# Altium PCB RoboFut.PcbDoc
Units mil, origin at the board's own origin, x right, y up, seen from the top; angles counter-clockwise.
Board outline 2896.14 x 2896.14 mil, 2 copper layers (Top Layer, Bottom Layer); 23 components, 53 nets, 120 pads, 23 vias.
Unrouted connection lines stored in the file: 2.
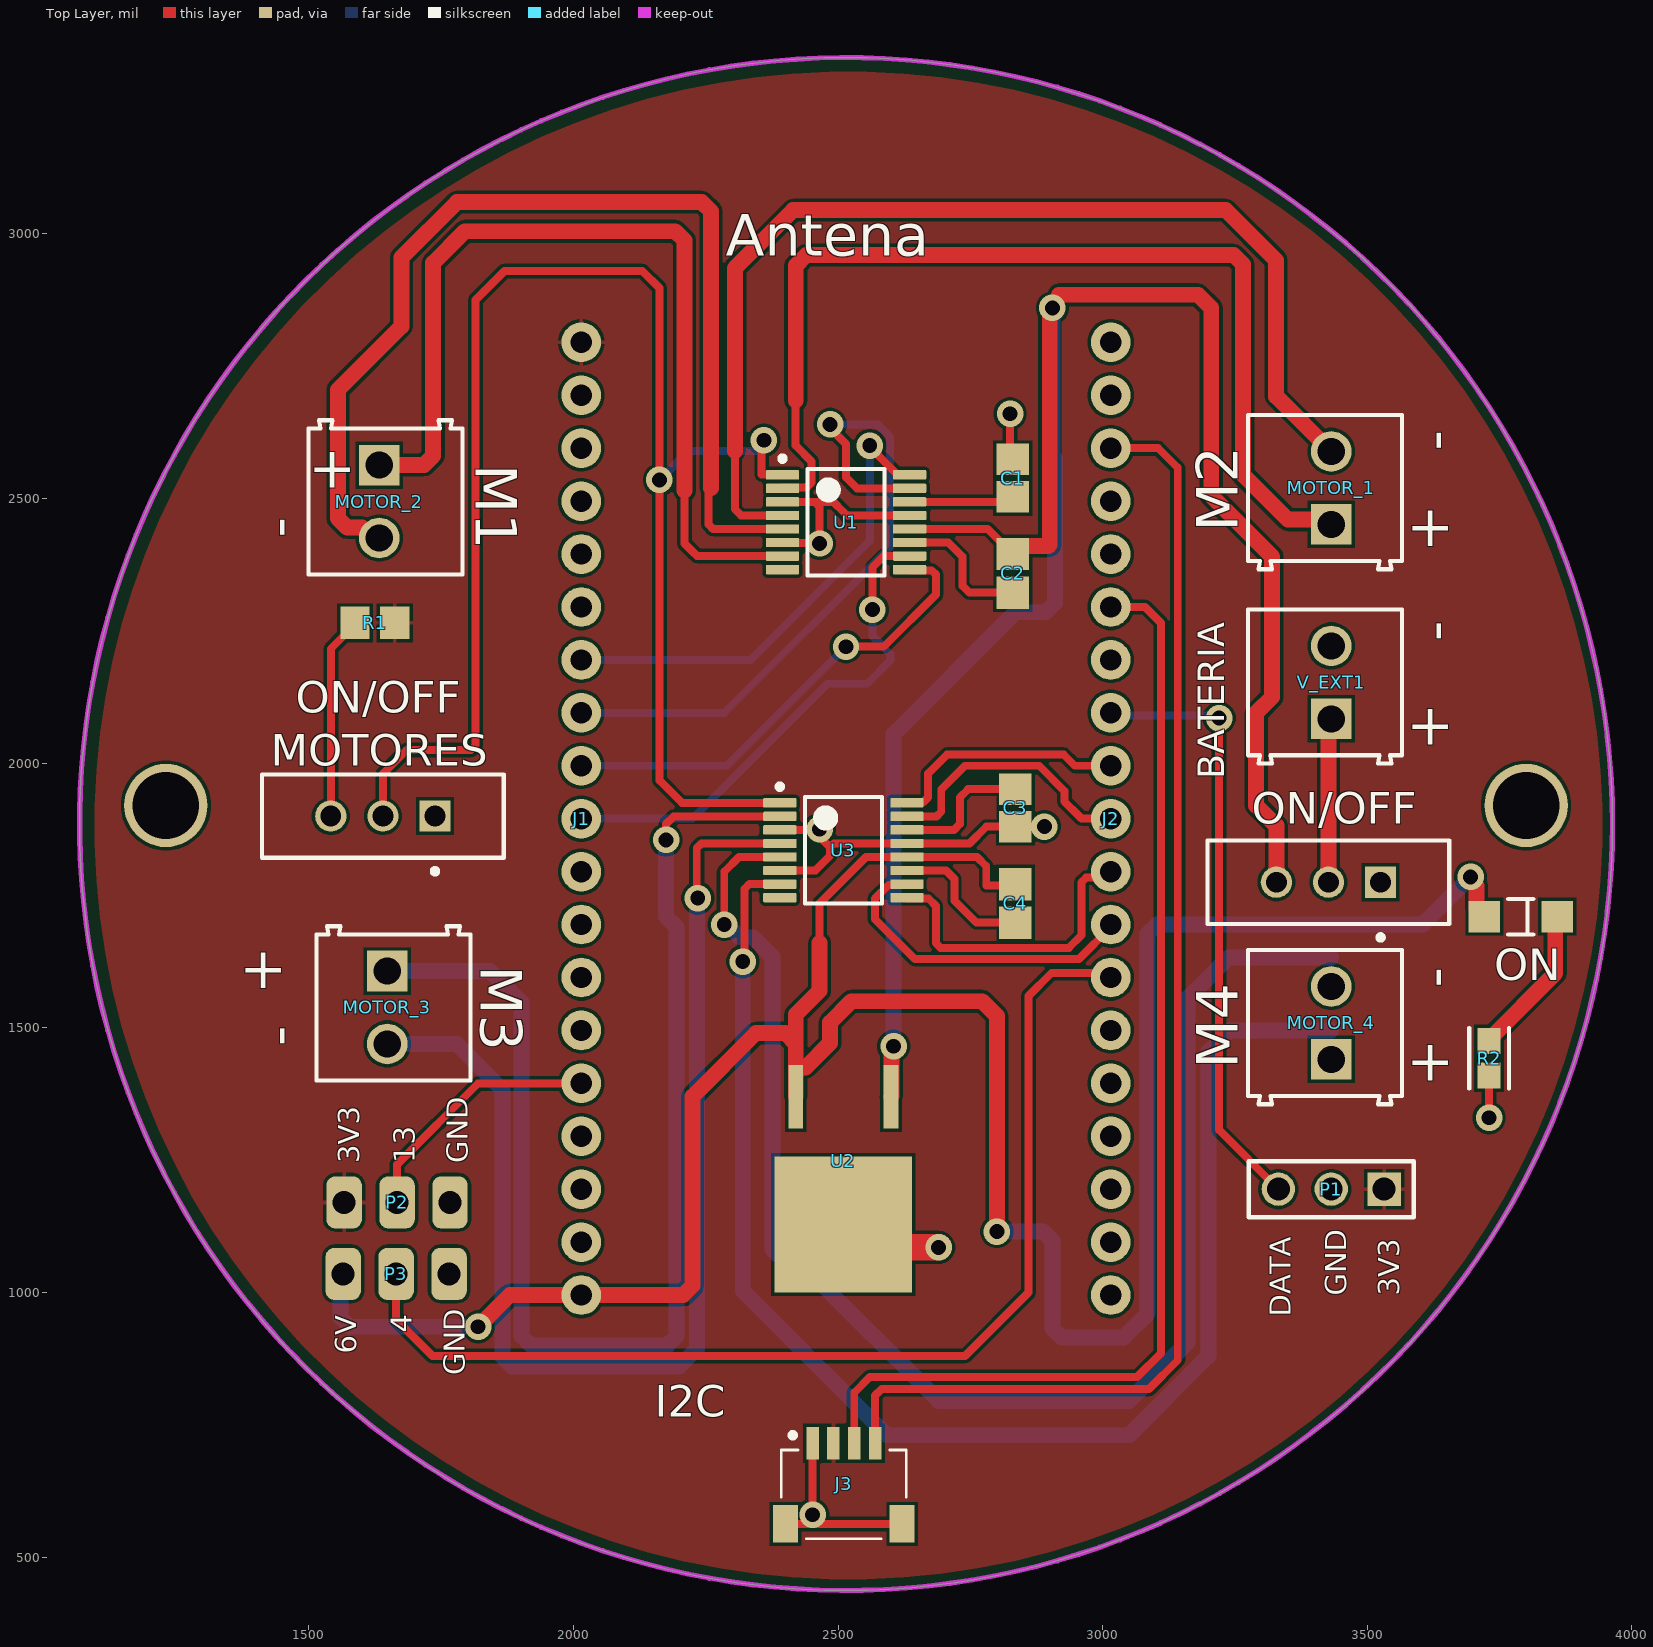
[diagram p0: Top Layer view]
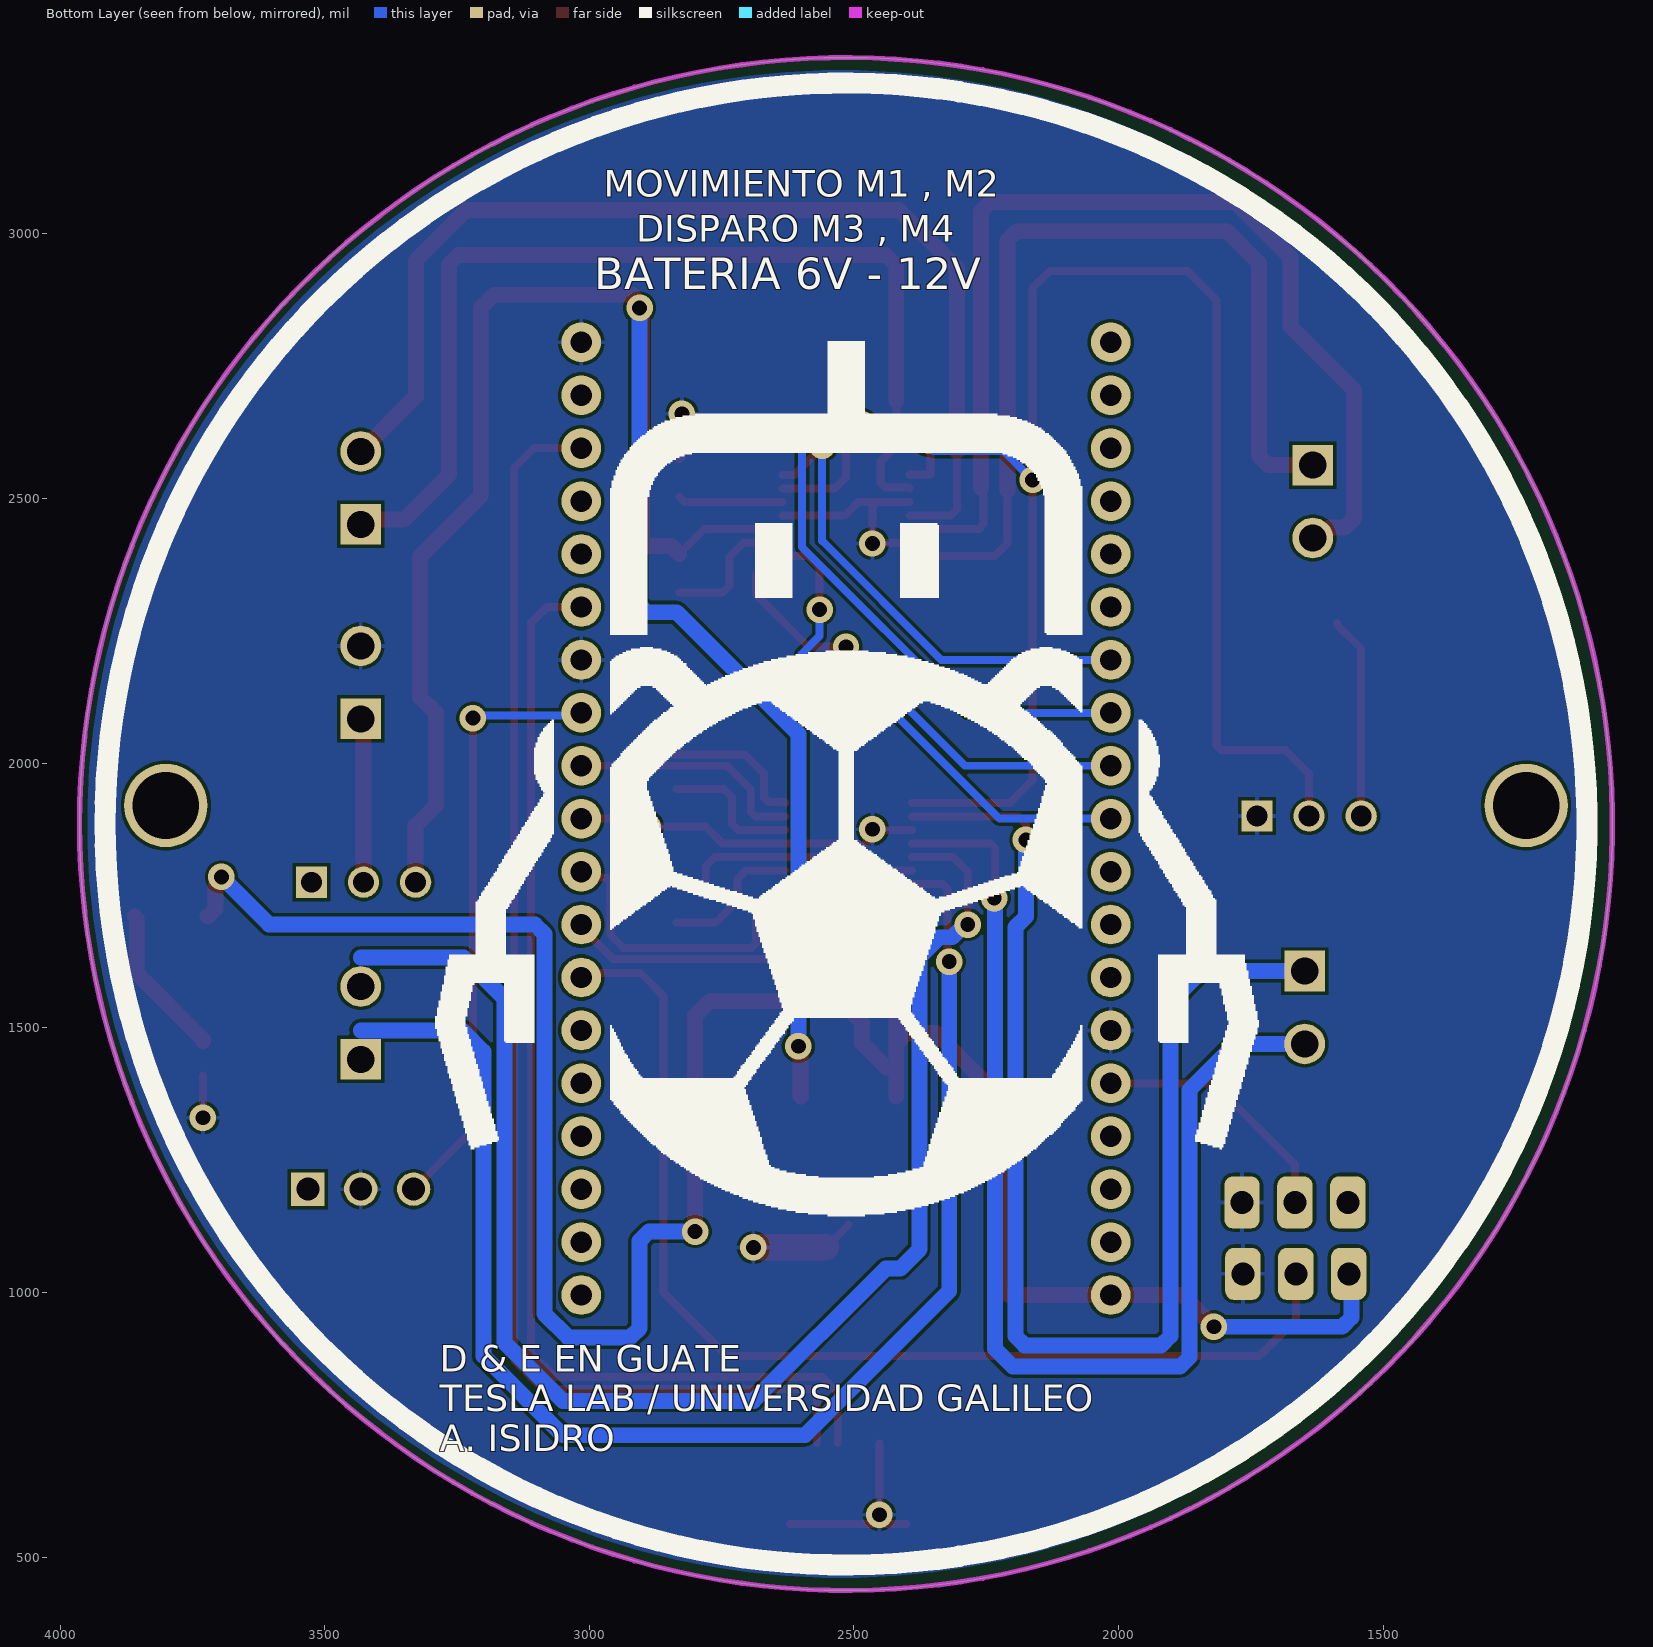
[diagram p1: Bottom Layer view, seen from below]
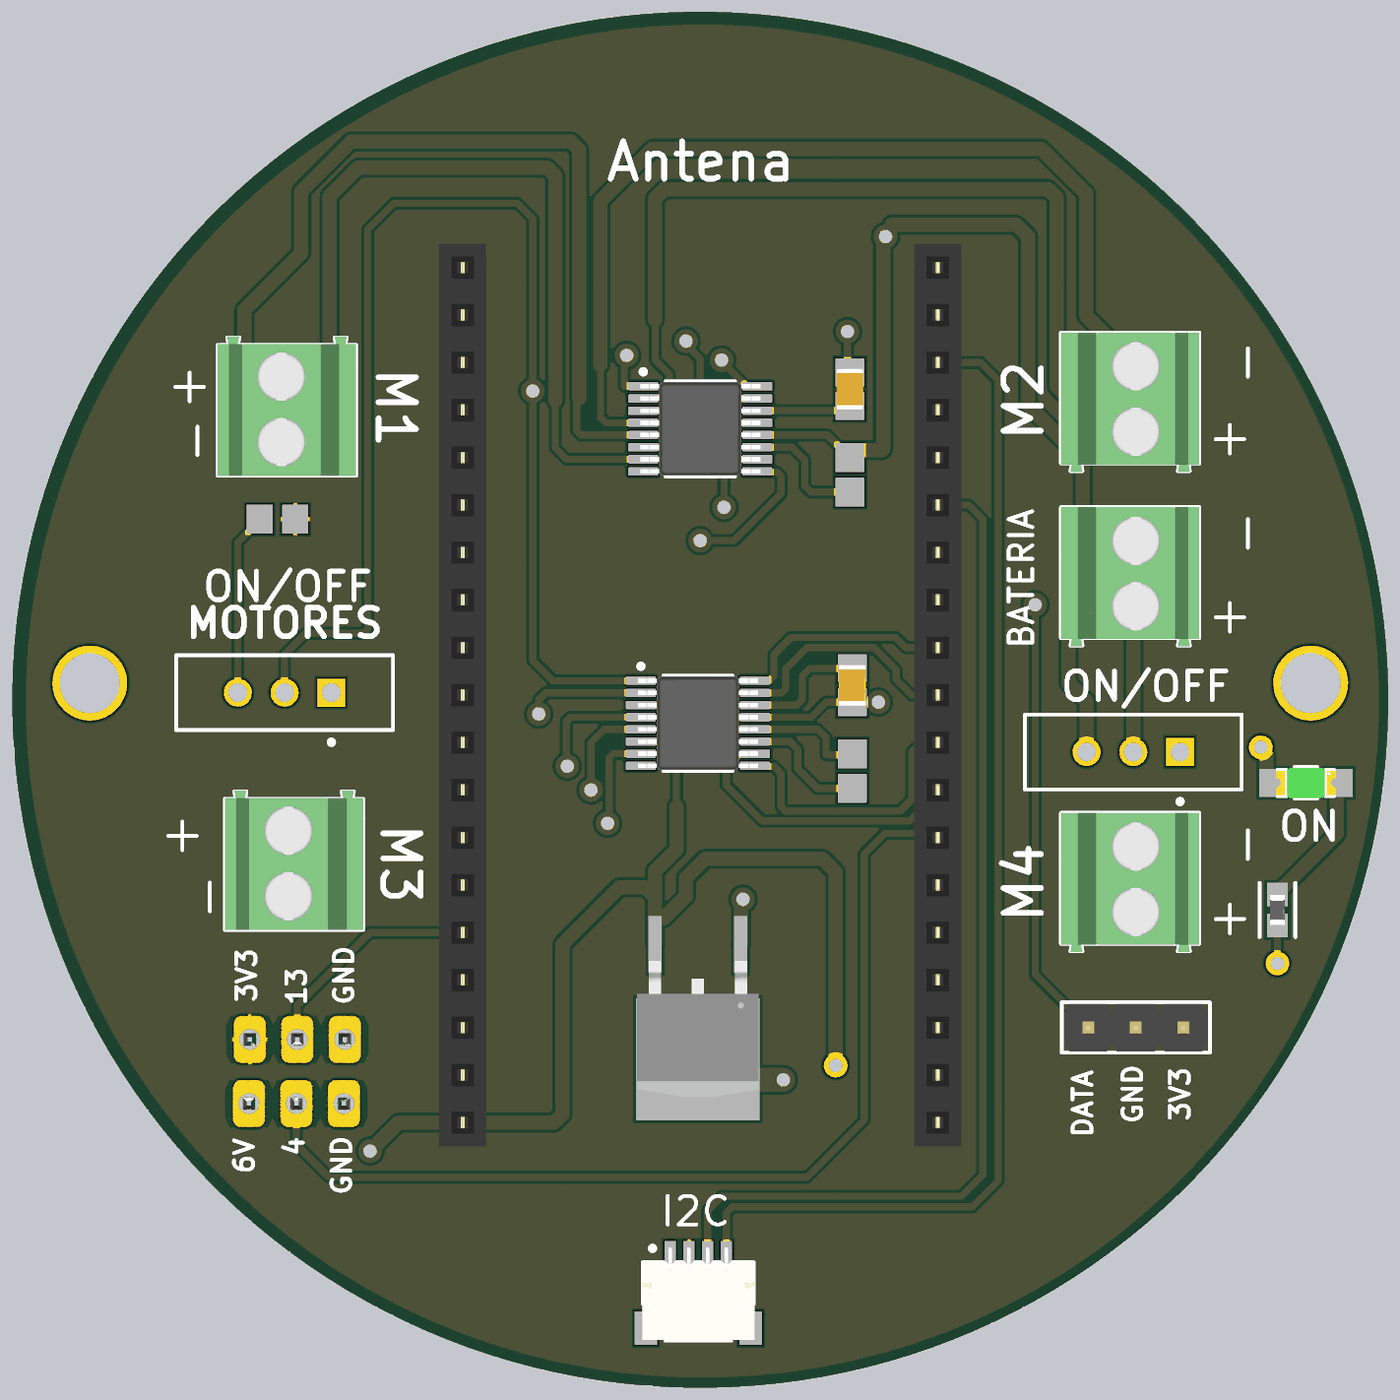
[diagram p2: 3D render of the assembled board from above, using the file's embedded part models]

## Layer stack, top to bottom
Top Solder: solder mask 0.4, Solder Resist, Dk 3.5
Top Layer: signal copper 1.4
Dielectric 1: dielectric 12.6, FR-4, Dk 4.8
Bottom Layer: signal copper 1.4
Bottom Solder: solder mask 0.4, Solder Resist, Dk 3.5

## Board outline
1066.93,1885 ccw(c2515,1885) 2515,436.93 ccw(c2515,1885) 3963.07,1885 ccw(c2515,1885) 2515,3333.07 ccw(c2515,1885)

## Design rules (kind name [scope] priority, off if disabled: settings)
BoardOutlineClearance [All] p1: gap=15 ignorepadtopadclearanceinfootprint=FALSE
Clearance [All] p1: gap=6 ignorepadtopadclearanceinfootprint=FALSE except(0: Arc-Hole Track-Hole SMDPad-Hole THPad-Hole Via-Hole Fill-Hole Poly-Hole Region-Hole Text-Hole)
ComponentClearance [All] p1: gap=1 collisioncheckmode=3 verticalgap=-10 showdistances=FALSE
DiffPairsRouting [All] p1: maxlimit=393.7 minlimit=6 mostfreqgap=8 toplayer_minwidth=6 toplayer_maxwidth=15 toplayer_prefwidth=8 bottomlayer_minwidth=6 bottomlayer_maxwidth=15 bottomlayer_prefwidth=8 maxuncoupledlength=500
HoleSize [All] p1: absolutevalues=TRUE maxlimit=265 minlimit=13 maxpercent=80.000 minpercent=20.000
HoleToHoleClearance [All] p1: gap=10 allowstackedmicrovias=FALSE
MinimumAnnularRing [All] p1: minimumring=7
MinimumSolderMaskSliver [All] p1: minsoldermaskwidth=0
PlaneClearance [All] p1: clearance=10
PlaneConnect [All] p1: planeconnectstyle=Direct reliefexpansion=16 reliefentries=4 reliefconductorwidth=6 reliefairgap=6
PolygonConnect [All] p1: connectstyle=Relief reliefconductorwidth=8 reliefentries=4 polygonreliefangle="90 Angle" airgapwidth=6
RoutingCorners [All] p1: cornerstyle=45-Degree minsetback=49.21 maxsetback=49.21
RoutingVias [All] p1: holewidth=15 width=30 viastyle="Through Hole" minholewidth=13 minwidth=27 maxholewidth=100 maxwidth=114
SilkToSilkClearance [All] p1: silktosilkclearance=0
SilkToSolderMaskClearance [IsPad] p1: minsilkscreentomaskgap=6 clearancetoexposedcopper=TRUE
SolderMaskExpansion [All] p1: expansion=2.95 istentingtop=FALSE
Width [All] p1: maxlimit=400 minlimit=6 preferedwidth=8
20 further rules are at their usual default settings.

## Classes and differential pairs
component class RoboFut: C1 C2 C3 C4 J1 J2 J3 MOTOR_1 MOTOR_2 MOTOR_3 MOTOR_4 ON ON/OFF P1 R1 R2 U1 U2 U3 V_EXT1

## Components (designator, comment, footprint, x,y, rotation, side; value= is the part's Value field where it differs from the comment)
C1 "0805ZD225KAT2A" CAPC2013X140X50ML20T25 2830,2538.58 r90 top
C2 "0.1 uF" CAPC2013X94X50ML20T25 2830,2358.58 r90 top
C3 "0805ZD225KAT2A" CAPC2013X140X50ML20T25 2835,1915.43 r270 top
C4 "0.1 uF" CAPC2013X94X50ML20T25 2835,1735 r90 top
J1 "PH1-19-UA" "PH1-19-UA - Socket" 2015,2795 r270 top locked
J2 "PH1-19-UA" "PH1-19-UA - Socket" 3015,2795 r270 top locked
J3 "SM04B-SRSS-TB(LF)(SN)" JST_SM04B-SRSS-TB(LF)(SN) 2510.94,715 r0 top
MOTOR_1 "691214110002" 691214110002 3420,2520 r90 top
MOTOR_2 "691214110002" 691214110002 1645,2494.25 r270 top
MOTOR_3 "691214110002" 691214110002 1660,1538.35 r270 top
MOTOR_4 "691214110002" 691214110002 3420,1509.09 r90 top
ON "HSMG-C150" FP-HSMG-C150-MFG 3790,1710 r180 top
ON/OFF "EG1218" ESWI-EG1218_V 3426.57,1775 r180 top (schematic designator ON/OFF2)
ON/OFF "EG1218" ESWI-EG1218_V 1640,1900 r180 top (schematic designator ON/OFF1)
P1 "61300311121" 61300311121#1 3431.81,1195 r180 top
P2 "61300311121" 61300311121#2 1666.81,1170 r180 top
P3 "61300311121" 61300311121#2 1665,1035 r180 top
R1 "ERA6AEB473V" RESC2013X60X40ML20T25 1625,2265 r0 top
R2 "ERA-3AEB471V" FP-ERA3A-IPC_A 3730,1442.49 r270 top
U1 "DRV8833PW" PW0016A_M 2515.08,2455.2 r0 top
U2 "BA06CC0FP-E2" TO252-3_ROM-M 2510,1130 r180 top
U3 "DRV8833PW" PW0016A_M 2510.08,1835.43 r0 top
V_EXT1 "691214110002" 691214110002 3420,2152.6 r90 top

## Footprints (in the part's own frame and the unit in brackets; to place one, negate y for a bottom-side part, rotate by r counter-clockwise, add the part's x,y. Pads: shape width x height; smd on the part's side, far side on the other; paste and mask are expansions set on the pad)
61300311121#1 [mm] "Pin Header, pitch 2.54 mm, THT, Vertical, single row, 3p"
  rect 1.6x1.6 hole 1.1: 1(-2.54,0)
  round 1.6 hole 1.1: 2(0,0) 3(2.54,0)
  silkscreen extent -3.96,-1.35 3.96,1.35, body extent -3.81,-1.27 3.81,1.27, height 8.57
61300311121#2 [mm] "Pin Header, pitch 2.54 mm, THT, Vertical, single row, 3p"
  rrect50% 1.7x2.5 hole 1.1: 1(-2.54,0) 2(0,0) 3(2.54,0)
  body extent -3.81,-1.27 3.81,1.27, height 8.57
691214110002 [mm] "3.50 mm Horizontal Entry Modular, 2p"
  rect 1.95x1.95 hole 1.3: 1(-1.75,-0.3)
  round 1.95 hole 1.3: 2(1.75,-0.3)
  silkscreen extent -3.9,-3.7 3.5,3.7, body extent -3.95,-3.7 3.5,3.7, height 8.55
CAPC2013X94X50ML20T25 [mm] "Chip Capacitor, 2-Leads, Body 2.01x1.25mm, IPC Low Density"
  rect 1.55x1.55 smd: 1(-0.925,0) 2(0.925,0)
  body extent -1.1,-0.72 1.11,0.72, height 0.94
CAPC2013X140X50ML20T25 [mm] "Chip Capacitor, 2-Leads, Body 2.2x1.45mm, IPC Low Density"
  rect 1.5x1.55 smd: 1(-0.9,0) 2(0.9,0)
  body extent -1.1,-0.72 1.1,0.72, height 1.4
ESWI-EG1218_V [mm] "THD, 3-Leads, Body 11.6x4mm, Pitch 2.5mm"
  rect 1.5x1.5 hole 1: 1(-2.5,0)
  round 1.5 hole 1: 2(0,0) 3(2.5,0)
  silkscreen extent -5.8,-2 5.8,2.77, body extent -5.8,-2 5.8,2, height 7.4
FP-ERA3A-IPC_A [mil]
  rect 49.41x43.55 smd paste+0 mask+0: 1(-32.51,0) 2(32.51,0)
  silkscreen extent -57,-38 57,38, body extent -77,-41 77,41, height 10
FP-HSMG-C150-MFG [mm]
  rect 1.5x1.5 smd paste+0 mask+0: 1(-1.75,0) 2(1.75,0)
  silkscreen extent -0.6,-0.85 0.6,0.85, body extent -2.6,-0.95 2.6,0.95, height 0.25
JST_SM04B-SRSS-TB(LF)(SN) [mm]
  rect 0.6x1.55 smd: 1(-1.5,0) 2(-0.5,0) 3(0.5,0) 4(1.5,0)
  rect 1.2x1.8 smd: S1(-2.8,-3.875) S2(2.8,-3.875)
  silkscreen extent -3,-4.57 3,0.48, body extent -3,-4.5 3,0.45, height 2.98
"PH1-19-UA - Socket" [mm] "Connector Header Through Hole 19 position 0.100\" (2.54mm)"
  round 1.905 hole 1.02: 1(0,0) 2(2.54,0) 3(5.08,0) 4(7.62,0) 5(10.16,0) 6(12.7,0) 7(15.24,0) 8(17.78,0) 9(20.32,0) 10(22.86,0) 11(25.4,0) 12(27.94,0) 13(30.48,0) 14(33.02,0) 15(35.56,0) 16(38.1,0) 17(40.64,0) 18(43.18,0) 19(45.72,0)
  body extent -1.27,-1.27 46.99,1.27, height 7
PW0016A_M [mm] "SOP, 16-Leads, Body 5.1x4.5mm, Pitch 0.65mm, IPC Low Density"
  rrect22% 1.6x0.45 smd: 1(-3.05,2.275) 2(-3.05,1.625) 3(-3.05,0.975) 4(-3.05,0.325) 5(-3.05,-0.325) 6(-3.05,-0.975) 7(-3.05,-1.625) 8(-3.05,-2.275) 9(3.05,-2.275) 10(3.05,-1.625) 11(3.05,-0.975) 12(3.05,-0.325) 13(3.05,0.325) 14(3.05,0.975) 15(3.05,1.625) 16(3.05,2.275)
  silkscreen extent -3.17,-2.55 1.85,3.17, body extent -3.21,-2.5 3.21,2.5, height 1
RESC2013X60X40ML20T25 [mm] "Chip Resistor, 2-Leads, Body 2.00x1.25mm, IPC Low Density"
  rect 1.4x1.55 smd: 1(-0.95,0) 2(0.95,0)
  body extent -1.1,-0.72 1.1,0.72, height 0.6
TO252-3_ROM-M [mil]
  rect 28x120 smd paste+0 mask+0: 1(-90,-240) 3(90,-240)
  rect 260x257 smd paste+0 mask+0: 2(0,2)
  body extent -128,-205 128,81, height 98

## Part data
C1 C3: library part CMP-2000-05810-1, "Chip Capacitor, 2.2 uF, +/- 10%, 10 V, -55 to 85 degC, 0805 (2012 Metric), RoHS, Tape and Reel", Capacitance=2.2µF, Case Size/Dimension=0805, Dielectric=X5R, Manufacturer=AVX, Package Description="2-Pin Surface Mount Device, Body 2.01 x 1.25 mm", Rated Voltage=10V, Tolerance (%)=±10%, Datasheet URL=http://datasheets.avx.com/cx5r.pdf, Datasheet Version=05/2016, Manufacturer URL=http://www.avx.com/, Mounting Technology=SurfaceMount, Package Reference=0805
C2 C4: library part CMP-2000-05016-1, "Chip Capacitor, Ceramic, 0.1 uF, 10%, 50 V, 0805, RoHS, Tape and Reel", Capacitance=100nF, Case Size/Dimension=0805, Dielectric=X7R, Manufacturer=AVX, Rated Voltage=50V, Tolerance (%)=±10%, Datasheet URL=http://www.farnell.com/datasheets/319609.pdf, Datasheet Version=Sep-07, Manufacturer URL=http://www.avx.com/
J1 J2: "Connector Header Through Hole 19 position 0.100\" (2.54mm)", Supplier Part Number 1=2057-PH1-19-UA-ND, Supplier 1=Digi-Key
J3: "Connector Header Surface Mount, Right Angle 4 position 0.039 _1.00mm_", Package=None, Availability=Unavailable, MF="JST Sales", MP=SM04B-SRSS-TB_LF__SN_, Price=None, SnapEDA_Link=https://www.snapeda.com/parts/SM04B-SRSS-TB%28LF%29%28SN%29/JST%20Sales%20America%20Inc./view-part/557466/?ref=snap
MOTOR_1 MOTOR_2 MOTOR_3 MOTOR_4 V_EXT1: library part CMP-1502-02464-1, "Serie 2141 - 3.50 mm Horizontal Entry Modular with Rising Cage Clamp WR-TBL, 2 pin", Manufacturer="Wurth Elektronik", Operating Temperature=-40to105degC, Datasheet URL=http://katalog.we-online.de/em/datasheet/6912141100xx.pdf, Manufacturer URL=http://www.we-online.de, Mounting Technology=THT, Package Reference=691214110002, Packaging=Box, Part Number=691214110002, Pin Number=2, Pitch=3.50mm, Publisher=WurthElektronik
ON: library part CMP-2000-05061-2, "LED GREEN DIFFUSED 1206 SMD", Colour=Green, Forward Current=20mA, Forward Voltage=2.2V, Manufacturer=Broadcom, Max Junction Temp=+95°C, Power Dissipation=65mW, Reverse Voltage=5V, Temperature="-40°C to +85°C", Temperature Range High=+85°C, Temperature Range Low=-40°C, Automotive=No, Category=Diode, ComponentLink2Description=Datasheet, ComponentLink2URL=https://docs.broadcom.com/docs/AV02-0551EN, Device Class L1=Optoelectronics, Device Class L2=LEDs, Device Class L3=unset, Digikey Description="LED GREEN DIFFUSED 1206 SMD", Height=1.2mm, Ipc Land Pattern Name=DIOCP320160X55, Lead Free=Yes, Led Orientation="Top View", Luminous Intensity=15mcd, Manufacturer Part Number=HSMG-C150, Mouser Description="LED Uni-Color Green 570nm 2-Pin Chip LED T/R", Octopart=https://octopart.com/hsmg-c150-broadcom-71131304, Package=HSMG-C150, Peak Emmision Wavelength=570nm, RoHS=TRUE, Viewing Angle=170°, Wavelength=572nm
ON/OFF ON/OFF: library part CMP-1696-00002-1, "Slide Switch, 500 V, -20 to 70 degC, 3-Pin THD, RoHS", Case\Package=SOT-23-5, Dropout Voltage="300 mV", Max Input Voltage="8 V", Max Operating Temperature="85 degC", Max Ouput Current="150 mA", Max Power Dissipation="250 mW", Min Input Voltage="4.3 V", Min Operating Temperature="-40 degC", Nominal Output Voltage="3.3 V", Package Quantity=3000, ComponentLink1Description="Manufacturer URL", ComponentLink1URL=http://www.e-switch.ch/en/, ComponentLink2Description=Datasheet, ComponentLink2URL=https://www.e-switch.com/system/asset/product_line/data_sheet/119/EG.pdf, DatasheetVersion=Oct-15, Height="1.3 mm", Length="3 mm", Mount="Surface Mount", Output Current="150 mA", Output Voltage="3.3 V", Outputs=1, PackageDescription="3-Pin Through Hole Device, Body 11.6 x 4 mm, Pitch 2.5 mm", PackageReference=EG1218, Packaging="Tape and Reel", Pins=5, Power Rating="250 mW", Radiation Hardening=No, REACH SVHC="No SVHC", RoHSCompliant=true, Width="1.8 mm"
P1 P2 P3: library part CMP-1502-01062-1, "THT Vertical Pin Header WR-PHD, Pitch 2.54 mm, Single Row, 3 pins", Contact Resistance=20mOhm, Manufacturer="Wurth Elektronik", Operating Temperature=-40to105degC, Rated Current=3A, Withstanding Voltage=500VAC, Working Voltage=250VAC, Datasheet URL=https://katalog.we-online.de/em/datasheet/6130xx11121.pdf, Gender=Male, Manufacturer URL=http://www.we-online.de, Mounting Technology=THT, Orientation=Vertical, Package Reference=61300311121, Packaging=Bag, Part Number=61300311121, Pin Number=3, Pitch=2.54mm, Publisher=WurthElektronik, Row Number=Single
R1: library part CMP-2001-00645-1, Manufacturer=Panasonic, Part Number=ERA6AEB473V
R2: library part CMP-2000-00071-2, "RES SMD 470 OHM 0.1% 1/10W 0603", Case Code (Imperial)=0603, Case Code (Metric)=1608, Max Operating Temperature=155°C, Max Power Dissipation=100mW, Min Operating Temperature=-55°C, Package Quantity=1, Resistance=470R, Resistance Tolerance=0.1%, Resistor Type="Thin Film", Temperature Coefficient=25ppm/°C, Voltage Rating=75V, Case/Package=0603, Construction=Rectangular, Contact Plating=Tin, Depth=0.8mm, Features="Automotive AEC-Q200", Height=0.45mm, Lead Free="Lead Free", Length=1.6mm, Military Standard=Not, Mount="Surface Mount", Number of Pins=2, Number of Terminations=2, Packaging="Tape and Reel", Power Rating=100mW, Radiation Hardening=No, REACH SVHC="No SVHC", RoHS Compliant=Yes, Series=ERA-3A, Size Code=0603, Technology="THIN FILM", Termination=SMD/SMT, Tolerance=0.1%, Voltage Rating (DC)=75V, Width=0.8mm
U1 U3: library part CMP-1529-00002-2, "2 A Low Voltage Dual Brushed DC or Single Bipolar Stepper Motor Driver (PWM Ctrl), 2.7 to 10.8 V, -40 to 85 degC, 16-Pin SOP (PW), Green (RoHS & no Sb/Br), Tube", Manufacturer="Texas Instruments", Package Reference=PW0016A, Peak Output Current="2 A", RMS Output Current="1.5 A", Temperature Range="-40 to 85 degC", ComponentLink1Description="Manufacturer URL", ComponentLink1URL=www.ti.com, ComponentLink2Description=Datasheet, ComponentLink2URL=http://www.ti.com/lit/ds/symlink/drv8833.pdf, ComponentLink3Description="Package Specification", ComponentLink3URL=http://www.ti.com/lit/ml/mpds361/mpds361.pdf, Control I/F=PWM, DatasheetVersion=SLVSAR1D, Eco-Plan="Green (RoHS & no Sb/Br)", Mounting Technology="Surface Mount", PackageDescription="16-Pin Plastic Small Outline, Body 4.4 x 5 mm, Pitch 0.65 mm", PackageVersion=4040064-4/G, Packing=Tube, PartNumber=DRV8833PW, rDS (ON) (LS + HS)="360 mOhms", Vs="2.7 V Min."
U2: "Linear Voltage Regulator IC Positive Fixed 1 Output 1A TO-252", Mfr_Name="ROHM Semiconductor", Supplier Part Number 1=1288844, Copyright="Copyright (C) 2022 Ultra Librarian. All rights reserved.", Digi-Key_Part_Number_1=BA06CC0FP-E2TR-ND, Digi-Key_Part_Number_2=BA06CC0FP-E2CT-ND, Digi-Key_Part_Number_3=BA06CC0FP-E2DKR-ND, Manufacturer_Part_Number=BA06CC0FP-E2, RefDes=RefDes, Supplier 1=RSComponents, Type=DEV

## Free pads (board coordinates)
  round 157.48 hole 125.98 paste+0: 5V(1230,1920) 5V(3800,1920)

## Via types
v1: diameter 50, hole 28, Top Layer to Bottom Layer, tented both sides, 20 vias
v2: diameter 50, hole 28, Top Layer to Bottom Layer, 3 vias

## Nets (pads, with @x,y where several pads share a name; then routed paths per layer and width w, separated by ;. In a path a pad name is that pad's centre, name@x,y a point inside that pad or via, vN(x,y) a via of type N, cw(c..) or ccw(c..) an arc to the next point about the centre after c; other vN are vias at no path point)
3V3: J1.1 J3.2 P1.1 P2.3 R1.2
6V: C4.2 J1.19 ON.2 P3.3 U2.3 U3.12 | length 5052.7
  Top Layer w15: 2465,1660 2465,1735 2552.64,1822.64 U3.12 2762.64,1822.64 2780,1805.28 2780,1768.79 2832.37,1768.79 C4.2
  Top Layer w30: v1(1820,935) 1880,995 J1.19 2207.43,995 2225,1012.57 2225,1370 2345,1490 2400,1490 2420,1470 ; U2.3 U2.3@2420,1414 ; 2465,1660 2465,1570 2420,1525 2420,1470 ; v2(2800,1115) 2800,1522.43 2772.43,1550 2525,1550 2485,1510 2485,1471.36 2438.64,1425 2431,1425 U2.3@2420,1414 ; v2(3695,1785) 3695,1779.59 3706.57,1768.01 3706.57,1724.53 ON.2 ; U2.3@2420,1414 2420,1470
  Bottom Layer w30: P3.3 1560,1030 1560,952.57 1577.57,935 v1(1820,935) ; v2(2800,1115) 2887.43,1115 2905,1097.43 2905,932.57 2922.57,915 3040,915 3085,960 3085,1677.43 3102.57,1695 3605,1695 v2(3695,1785)
AIN_1: J1.7 U1.16 | length 917.8
  Top Layer w15: v1(2560,2600) 2560,2597.28 2612.52,2544.76 U1.16
  Bottom Layer w15: J1.7 2335,2195 2560,2420 v1(2560,2600)
AIN_1_1: J2.9 U3.16 | length 457.5
  Top Layer w15: U3.16 2631.52,1926.36 2661.21,1926.36 2670,1935.15 2670,1980 2706,2016 2926.38,2016 2947.38,1995 J2.9
AIN_2: J1.8 U1.15 | length 1285.5
  Top Layer w15: v1(2485,2640) 2485,2632.82 2515,2602.82 2515,2540 2535.83,2519.17 U1.15
  Bottom Layer w15: J1.8 2285,2095 2598.5,2408.5 2598.5,2615.95 2574.45,2640 v1(2485,2640)
AIN_2_2: J2.10 U3.15 | length 502.1
  Top Layer w15: U3.15 2686.21,1899.41 2695,1908.2 2695,1950 2740,1995 2880,1995 2927.5,1947.5 2927.5,1927.5 2955.01,1899.99 2960,1895 J2.10
BIN_1: J1.9 U1.9 | length 895.3
  Top Layer w15: v1(2515,2220) 2586.21,2220 2685,2318.79 2685,2356.21 2676.94,2364.27 2636.52,2364.27 U1.9
  Bottom Layer w15: J1.9 2290,1995 v1(2515,2220)
BIN_1_1: J2.11 U3.9 | length 583.3
  Top Layer w15: U3.9 2631.52,1744.51 2670.49,1744.51 2685,1730 2685,1659.79 2693.79,1651 2936,1651 2960,1675 2960,1774.73 2968.79,1783.52 3003.52,1783.52 J2.11
BIN_2: J1.10 U1.10 | length 976.7
  Top Layer w15: v1(2565,2290) 2565,2370 2586.22,2391.22 U1.10
  Bottom Layer w15: J1.10 2225,1895 2480,2150 2555,2150 2598.79,2193.79 2598.79,2206.21 2565,2240 v1(2565,2290)
BIN_2_2: J2.12 U3.10 | length 616.5
  Top Layer w15: U3.10 2628.8,1770.1 2596.09,1770.1 2570,1744.01 2570,1705 2645,1630 2955,1630 3015,1690 J2.12
CLK: J2.19
CMD: J1.18
dSense: J2.8 P1.3 | length 1145.5
  Top Layer w15: v1(3220,2085) 3220,1306.81 P1.3
  Bottom Layer w15: J2.8 3020,2090 3215,2090 v1(3220,2085)
EN: J1.2
GND: C1.2 C3.2 J1.14 J2.1 J2.7 J3.1 J3.S1 J3.S2 ON/OFF.1@1738.43,1900 P1.2 P2.1 P3.1 R2.2 U1.3 U1.6 U1.13 U2.2 U3.3 U3.6 U3.13 V_EXT1.2 | length 1801.3
  Top Layer w15: U3.6 2457.05,1797.05 2485,1825 2485,1841.21 ; U3.3 2463.82,1873.82 v1(2465,1875) ; U1.6 2395.91,2415.91 2464.09,2415.91 v1(2465,2415) 2465,2484.8 2456.21,2493.58 ; U1.3 2456.21,2493.58 ; J3.S1 v1@2455,562.44 ; J3.1 v1(2451.89,580) 2455,576.89 v1@2455,562.44 ; v1@2458.11,1868.11 2485,1841.21 ; U2.2 U2.2@2553,1085 ; J3.S2 v1@2455,562.44 ; U1.13 2517.01,2467.99 2510.01,2474.99 2491.42,2493.58 2456.21,2493.58 ; v1(2825,2660) 2825,2579.02 C1.2 ; v1(2890,1880) C3.2 2780,1880 2748.23,1848.23 U3.13 2492.02,1848.23 2485,1841.21 ; v2(3730,1330) R2.2
  Top Layer w50: U2.2@2553,1085 v1(2690,1085)
IO0: J2.14
IO2: J2.15
IO4: J2.13 P3.2 | length 2096.2
  Top Layer w15: P3.2 1665,948.79 1733.79,880 2740,880 2860,1000 2860,1560 2903.79,1603.79 3006.21,1603.79 J2.13
IO13: J1.15 P2.2 | length 483.5
  Top Layer w15: P2.2 1666.81,1241.81 1820,1395 J1.15
IO15: J2.16
IO23: J2.2
IO27: J1.11
IO34: J1.5
IO35: J1.6
NetC1_1: C1.1 U1.14 | length 198.8
  Top Layer w15: U1.14 2820.43,2493.58 C1.1
NetC2_1: C2.1 U1.11 | length 266.3
  Top Layer w15: U1.11 2708.19,2416.81 2735,2390 2735,2335 2747.83,2322.17 C2.1
NetC3_1: C3.1 U3.14 | length 266
  Top Layer w15: U3.14 2718.82,1873.82 2730,1885 2730,1935 2745.87,1950.87 C3.1
NetC4_1: C4.1 U3.11 | length 269.8
  Top Layer w15: U3.11 2704.17,1797.05 2720,1781.21 2720,1740 2761.42,1698.58 C4.1
NetMOTOR_1_1: MOTOR_1.1 U1.2 | length 1945.6
  Top Layer w15: U1.2 2396.36,2520.53 2440.53,2520.53 2450,2530 2450,2570 2420,2600 2420,2685
  Top Layer w30: 2420,2685 2420,2940 2440,2960 3247.43,2960 3265,2942.43 3265,2545 3350,2460 3422.91,2460 MOTOR_1.1
NetMOTOR_1_2: MOTOR_1.2 U1.4 | length 2061.7
  Top Layer w15: 2305,2590 2305,2480 2310.01,2474.99 2317.01,2467.99 U1.4
  Top Layer w30: 2305,2590 2305,2935 2415,3045 3232.43,3045 3327.64,2949.78 3327.64,2693.06 MOTOR_1.2
NetMOTOR_2_1: MOTOR_2.1 U1.7 | length 1747.8
  Top Layer w15: 2210,2515 2210,2415 2225.01,2399.99 2233.78,2391.22 U1.7
  Top Layer w30: MOTOR_2.1 1717.43,2563.15 1735,2580.72 1735,2945 1795,3005 2192.43,3005 2210,2987.43 2210,2515
NetMOTOR_2_2: MOTOR_2.2 U1.5 | length 2031.9
  Top Layer w15: 2260,2520 2255,2515 2255,2451.19 2263.79,2442.4 U1.5
  Top Layer w30: MOTOR_2.2 1640.35,2425.35 1630,2415 1625,2420 1625,2420.89 1601.64,2444.24 1600.89,2445 1572.57,2445 1555,2462.57 1555,2705 1675,2825 1675,2955 1780,3060 2242.43,3060 2260,3042.43 2260,2520
NetMOTOR_3_1: MOTOR_3.1 U3.2 | length 2413
  Top Layer w15: v1(2175,1855) 2175,1885 2189.41,1899.41 U3.2
  Bottom Layer w30: MOTOR_3.1 1842.76,1607.24 1854.99,1595.01 1902,1548 1902,917.57 1919.57,900 2177.43,900 2195,917.57 2195,1690 2175,1710 v1(2175,1855)
NetMOTOR_3_2: MOTOR_3.2 U3.4 | length 2255.7
  Top Layer w15: v1(2235,1745) 2232.98,1747.02 2232.98,1839.44 2241.77,1848.23 U3.4
  Bottom Layer w30: MOTOR_3.2 1779.45,1469.45 1866,1382.9 1866,877.57 1883.57,860 2200.01,860 2233.53,893.52 2233.53,1743.53 v1(2235,1745)
NetMOTOR_4_1: MOTOR_4.1 U3.7 | length 2710.2
  Top Layer w15: v1(2320,1625) 2323.5,1628.5 2323.5,1762.67 2332.29,1771.46 U3.7
  Bottom Layer w30: v1(2320,1625) 2320,1002.57 2592.57,730 3050,730 3200,880 3200,1455 3240.2,1495.2 3431.81,1495.2
NetMOTOR_4_2: MOTOR_4.2 U3.5 | length 2787.6
  Top Layer w15: v1(2285,1695) 2285,1795 2312.64,1822.64 U3.5
  Bottom Layer w30: v1(2285,1695) 2290.41,1695 2314.41,1671 2339.05,1671 2375.81,1634.24 2375.81,1081.76 2412.57,1045 2440,1045 2690,795 3050,795 3160,905 3160,1555 3237.99,1632.99 3431.81,1632.99
NetON/OFF1_3: ON/OFF.3@1541.57,1900 R1.1 | length 384.1
  Top Layer w15: ON/OFF.3@1541.57,1900 1541.57,2216.02 1587.6,2262.05 R1.1
NetON/OFF2_2: ON/OFF.2@3426.57,1775 V_EXT1.1 | length 310.9
  Top Layer w15: V_EXT1.1@3426.57,2078.46 V_EXT1.1
  Top Layer w30: ON/OFF.2@3426.57,1775 V_EXT1.1@3426.57,2078.46
NetON_1: ON.1 R2.1 | length 288.4
  Top Layer w30: R2.1 3730,1477.93 3855,1602.93 3855,1706.1 ON.1
nSLEEP: ON/OFF.2@1640,1900 U1.1 U3.1 | length 3018.9
  Top Layer w15: ON/OFF.2@1640,1900 1640,1980 1685,2025 1806.21,2025 1815,2033.79 1815,2875 1870,2930 2130,2930 2162.5,2897.5 v1(2162.5,2535) 2162.5,1967.5 2205,1925 U3.1 ; v1(2360,2610) 2355,2605 2355,2545 2394.76,2545 U1.1
  Bottom Layer w15: v1(2162.5,2535) 2217.5,2590 2350,2590 2350,2590.53 2360,2600.53 v1(2360,2610)
PWM_A: J1.13
PWM_B: J1.12
RXD0: J2.5
SCK/SCL: J2.3 J3.4 | length 2517.9
  Top Layer w15: J3.4 2570,805 2582.5,817.5 3087.5,817.5 3141.82,871.82 3141.82,2558.18 3105,2595 J2.3
SD0: J2.18
SD1: J2.17
SD2: J1.16
SD3: J1.17
SDI/SDA: J2.6 J3.3 | length 2193.2
  Top Layer w15: J3.3 2530.63,810.63 2560,840 3065,840 3110,885 3110,2265 3080,2295 J2.6
TXD0: J2.4
V_EXT: C2.2 ON/OFF.3@3328.15,1775 U1.12 U2.1 | length 3851.9
  Top Layer w15: U1.12 2782.6,2442.4 C2.2
  Top Layer w30: U2.1 2601,1371 2601,1455.59 2605,1459.59 v1(2605,1465) ; C2.2 2845.51,2410.51 2897.94,2410.51 2900,2412.57 v1@2900,2860 ; 2917.57,2885 3180,2885 3205,2860 3205,2505 3320,2390 3320,2125 3290,2095 3290,1920 3328.15,1881.85 ON/OFF.3@3328.15,1775
  Bottom Layer w30: v1(2605,1465) 2605,2055 2835,2285 2892.43,2285 2910,2302.57 2910,2576.08 2905,2581.08 v1(2905,2860)
VN: J1.4
VP: J1.3
pads on no net: ON/OFF.1@3525,1775 U1.8 U3.8

## Polygon pours and split planes (outlines as drawn)
GND on Bottom Layer "NONET_L-01_P-001" (solid, pour order 1): 1101.11,1885 ccw(c2525,1885) 2525,461.11 ccw(c2525,1885) 3948.89,1885 ccw(c2525,1885) 2525,3308.89 ccw(c2525,1885)
3V3 on Top Layer "NONET_L-01_P-001" (solid, pour order 0): 1095.61,1882.17 ccw(c2519.5,1882.17) 2519.5,458.28 ccw(c2519.5,1882.17) 3943.38,1882.17 ccw(c2519.5,1882.17) 2519.5,3306.06 ccw(c2519.5,1882.17)

## Keep-outs
Keep-Out Layer:
  circle w10: c2515,1885 r1448.07

## Silkscreen, mask and mechanical layers (free items; w line width, h text height)
Top Overlay:
  text "Antena" at 2287.53,2959 h78.74
  text "-" at 3665,2629.24 h78.74 r90
  text "M1" at 1815,2564.48 h78.74 r270
  text "+" at 1589.62,2520 h78.74
  text "-" at 1480,2464.24 h78.74 r90
  text "M2" at 3255,2437.4 h78.74 r90
  text "+" at 3664.24,2410 h78.74
  text "-" at 3665,2269.24 h78.74 r90
  text "+" at 3664.24,2035 h78.74
  text "MOTORES" at 1428.06,1995 h60
  text "BATERIA" at 3230,1969.55 h50 r90
  text "M3" at 1825,1617.6 h78.74 r270
  text "-" at 3665,1614.24 h78.74 r90
  text "+" at 1459.24,1575 h78.74
  text "-" at 1480,1504.24 h78.74 r90
  text "M4" at 3255,1422.4 h78.74 r90
  text "+" at 3664.24,1400 h78.74
  text "3V3" at 1595,1243.68 h40 r90
  text "13" at 1700,1243.68 h40 r90
  text "GND" at 1800,1243.68 h40 r90
  text "GND" at 3460,993.68 h40 r90
  text "3V3" at 3560,993.68 h40 r90
  text "DATA" at 3355,953.69 h40 r90
  text "4" at 1695,923.66 h40 r90
  text "6V" at 1590,883.67 h40 r90
  text "GND" at 1795,843.68 h40 r90
  text "I2C" at 2153.78,765 h60
Bottom Overlay:
  drawing of 7 lines, arcs and shapes, not listed
  text "MOVIMIENTO M1 , M2" at 2972.3,3070 h50
  text "DISPARO M3 , M4" at 2911.15,2985 h50
  text "BATERIA 6V - 12V" at 2990.97,2895 h60
  text "D & E EN GUATE / TESLA LAB / UNIVERSIDAD GALILEO / A. ISIDRO" at 3282.74,700 h50